# EAGLE board ElectronicsBoard v15 (EAGLE 9.7.0)
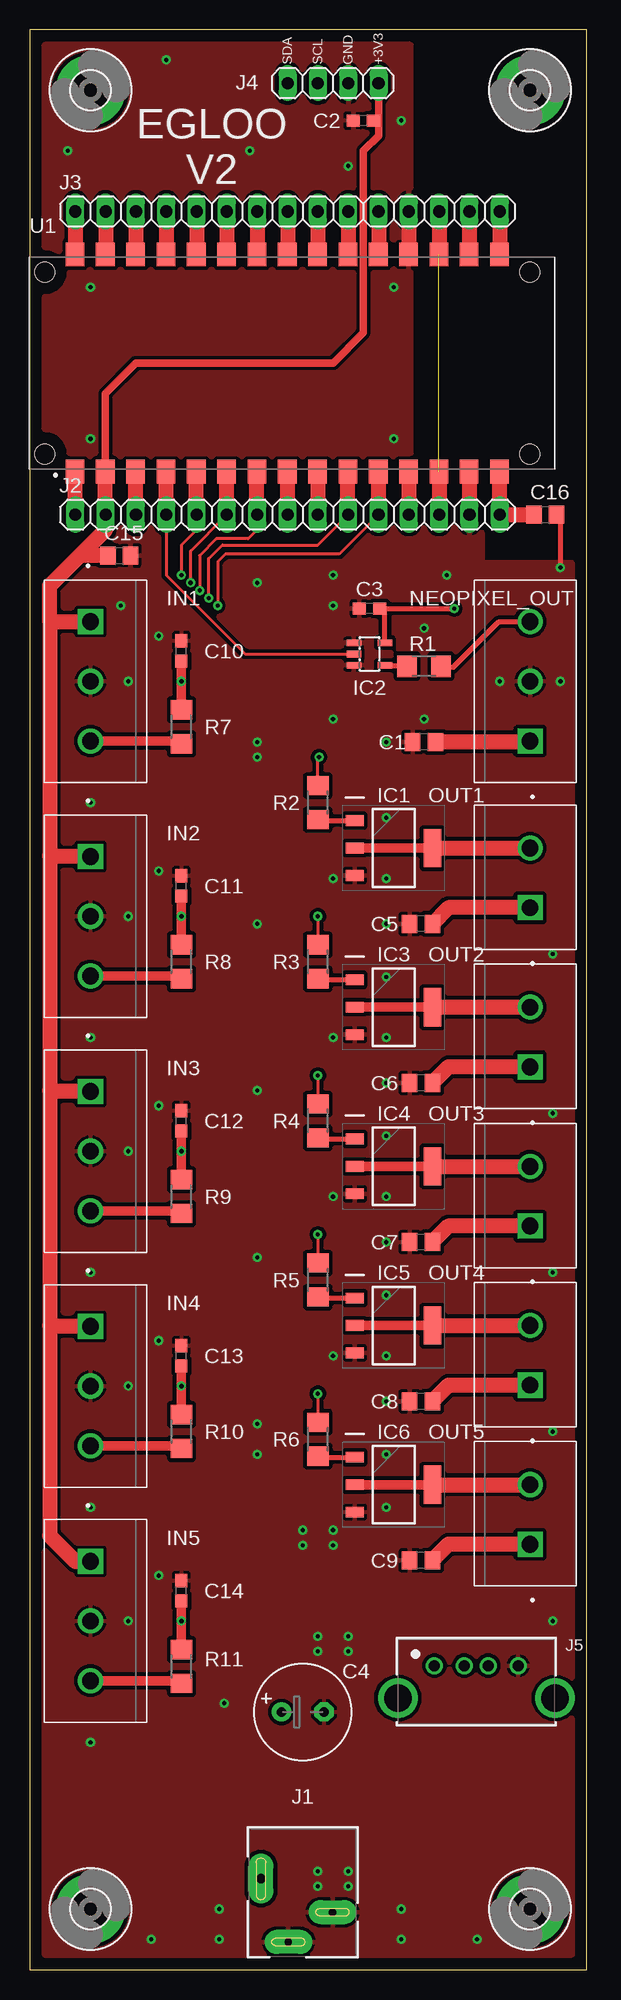
[diagram p0: board, top side]
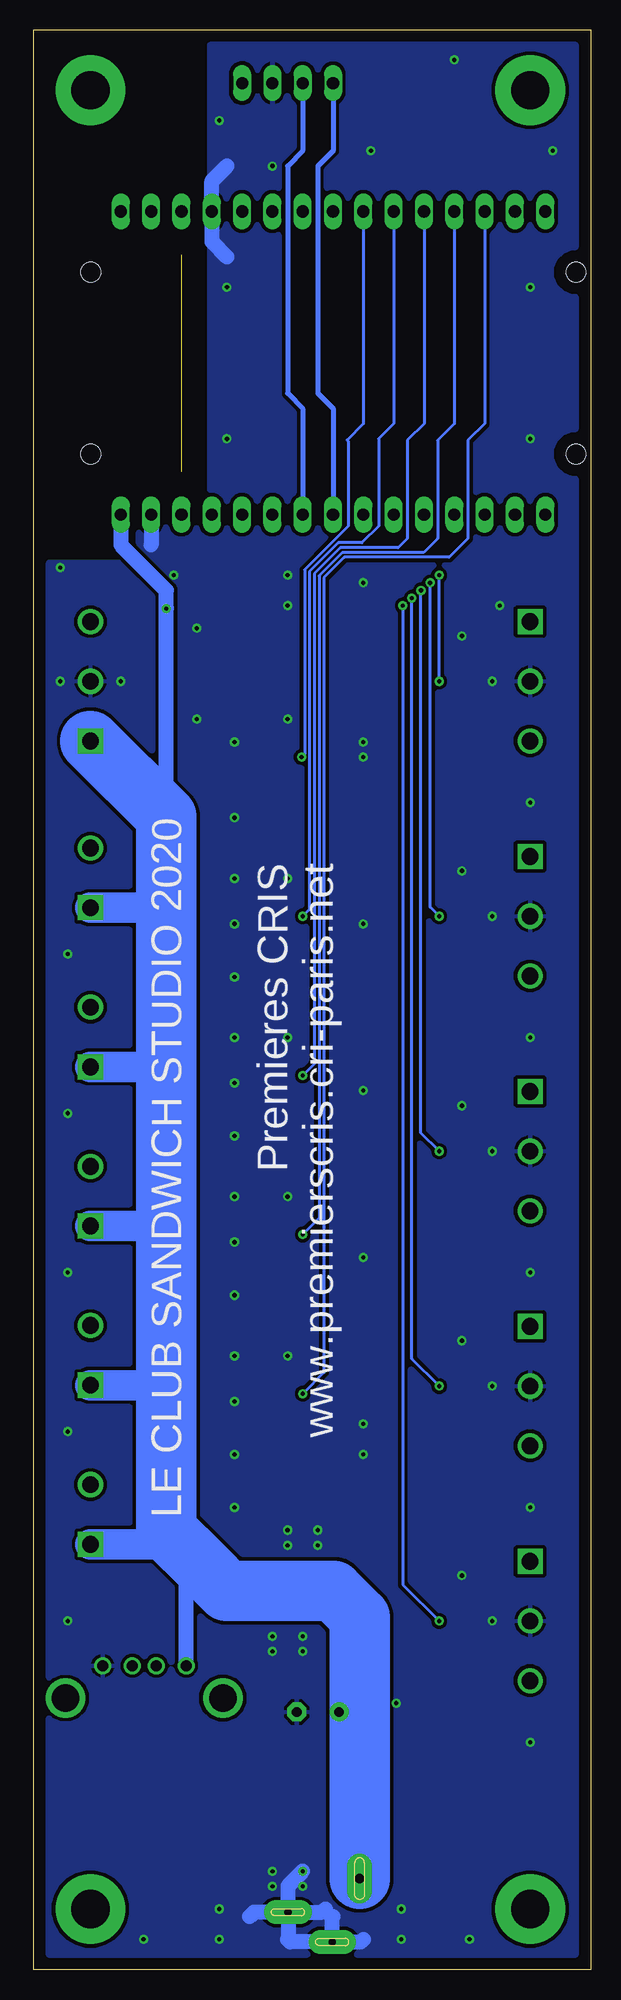
[diagram p1: board, bottom side, seen from below]

Size 46.66 x 162.54 mm. Coordinates in mm from the lower left corner, seen from the top.
Outline: 0,162.54 0,0 46.66,0 46.66,162.54 0,162.54
Copper layers (1*16): Top 0.035mm / dielectric 1.5mm / Bottom 0.035mm
Design rules "default": minimum track width 6mil, minimum drill 0.35mm, track to track 6mil, track to pad 6mil, pad to pad 6mil, via to via 6mil, smd to smd 6mil, copper to edge 40mil, drill to drill 6mil, minimum pad ring 10mil, minimum via ring 8mil, stop-mask expansion 4mil, vias tented up to drill 0mil, thermal gap 10mil

## Footprints (pad centres in the part's own frame; a part is rotated, then mirrored left to right if it is on the bottom)
C0805 = smd 1.3 x 1.5: 1 -0.95,0; 2 0.95,0
C0603 = smd 1.1 x 1: 1 -0.85,0; 2 0.85,0
E3,5-8 = drill 0.813 pad 1.6: + -1.778,0 | drill 0.813 pad 1.6 octagon: - 1.778,0
3,2-PAD = drill 3.2 pad 5.842: B3,2 0,0
SOT230P700X170-4N = smd 1.5 x 0.9: 1 -3.25,2.3; 2 -3.25,0; 3 -3.25,-2.3 | smd 1.5 x 3.2: 4 3.25,0
SOT23-5L = smd 0.55 x 1.2: 1 -0.95,-1.3; 2 0,-1.3; 3 0.95,-1.3; 4 0.95,1.3; 5 -0.95,1.3
PHOENIX_1755529 = drill 1.4 square: 1 -5,0 | drill 1.4: 2 0,0; 3 5,0
694106402002 = drill 0.8 pad 2.1 long: 1 -3.5,0 | drill 0.6 pad 2 long: 2 -1.2,-5.3; 3 2.5,-2.8
1X15 = drill 1.016 long: 1 -17.78,0; 2 -15.24,0; 3 -12.7,0; 4 -10.16,0; 5 -7.62,0; 6 -5.08,0; 7 -2.54,0; 8 0,0; 9 2.54,0; 10 5.08,0; 11 7.62,0; 12 10.16,0; 13 12.7,0; 14 15.24,0; 15 17.78,0
1X04 = drill 1.016 long: 1 -3.81,0; 2 -1.27,0; 3 1.27,0; 4 3.81,0
614004135023 = drill 0.92: 1 -3.5,1.34; 2 -1,1.34; 3 1,1.34; 4 3.5,1.34 | drill 2.3: S1 -6.57,-1.37; S2 6.59,-1.37
PHOENIX_1755516 = drill 1.4 square: 1 -5,0 | drill 1.4: 2 0,0
R1206 = smd 1.6 x 1.803: 1 -1.422,0; 2 1.422,0
MODULE_ABX00030 = smd 1.56 x 2: 1 -18.19,-9.1; 2 -15.65,-9.1; 3 -13.11,-9.1; 4 -10.57,-9.1; 5 -8.03,-9.1; 6 -5.49,-9.1; 7 -2.95,-9.1; 8 -0.41,-9.1; 9 2.13,-9.1; 10 4.67,-9.1; 11 7.21,-9.1; 12 9.75,-9.1; 13 12.29,-9.1; 14 14.83,-9.1; 15 17.37,-9.1; 16 17.37,9.1; 17 14.83,9.1; 18 12.29,9.1; 19 9.75,9.1; 20 7.21,9.1; 21 4.67,9.1; 22 2.13,9.1; 23 -0.41,9.1; 24 -2.95,9.1; 25 -5.49,9.1; 26 -8.03,9.1; 27 -10.57,9.1; 28 -13.11,9.1; 29 -15.65,9.1; 30 -18.19,9.1 | hole 1.651: -20.73,-7.62; -20.73,7.62; 19.91,7.62; 19.91,-7.62

## Placement (x,y rotation side)
C1  10uF  [C0805]  33.02,102.87 180 top
C2  0.1uF  [C0603]  27.94,154.94 180 top
C3  0.1uF  [C0603]  28.45,114.05 180 top
C4  [E3,5-8]  22.86,21.59 0 top
C5  10uF  [C0805]  32.77,87.63 180 top
C6  10uF  [C0805]  32.77,74.3 180 top
C7  10uF  [C0805]  32.77,60.96 180 top
C8  10uF  [C0805]  32.77,47.62 180 top
C9  10uF  [C0805]  32.77,34.29 180 top
C10  0.1uF  [C0603]  12.7,110.49 90 top
C11  0.1uF  [C0603]  12.7,90.81 90 top
C12  0.1uF  [C0603]  12.7,71.12 90 top
C13  0.1uF  [C0603]  12.7,51.44 90 top
C14  0.1uF  [C0603]  12.7,31.75 90 top
C15  10uF  [C0805]  7.49,118.49 0 top
C16  10uF  [C0805]  43.18,121.92 0 top
H1  MOUNT-PAD-ROUND3.2  [3,2-PAD]  5.08,5.08 0 top
H2  MOUNT-PAD-ROUND3.2  [3,2-PAD]  41.91,5.08 0 top
H3  MOUNT-PAD-ROUND3.2  [3,2-PAD]  5.08,157.48 0 top
H4  MOUNT-PAD-ROUND3.2  [3,2-PAD]  41.91,157.48 0 top
IC1  BTS3110N  [SOT230P700X170-4N]  30.48,93.98 0 top
IC2  74AHC1G125  [SOT23-5L]  28.45,110.24 270 top
IC3  BTS3110N  [SOT230P700X170-4N]  30.48,80.64 0 top
IC4  BTS3110N  [SOT230P700X170-4N]  30.48,67.31 0 top
IC5  BTS3110N  [SOT230P700X170-4N]  30.48,53.98 0 top
IC6  BTS3110N  [SOT230P700X170-4N]  30.48,40.64 0 top
IN1  1755529  [PHOENIX_1755529]  5.08,107.95 270 top
IN2  1755529  [PHOENIX_1755529]  5.08,88.27 270 top
IN3  1755529  [PHOENIX_1755529]  5.08,68.58 270 top
IN4  1755529  [PHOENIX_1755529]  5.08,48.9 270 top
IN5  1755529  [PHOENIX_1755529]  5.08,29.21 270 top
J1  [694106402002]  22.86,7.62 0 top
J2  [1X15]  21.59,121.92 0 top
J3  [1X15]  21.59,147.32 0 top
J4  [1X04]  25.4,158.08 180 top
J5  614004135023  [614004135023]  37.4,24.13 0 top
NEOPIXEL_OUT  1755529  [PHOENIX_1755529]  41.91,107.95 90 top
OUT1  1755516  [PHOENIX_1755516]  41.91,93.98 90 top
OUT2  1755516  [PHOENIX_1755516]  41.91,80.64 90 top
OUT3  1755516  [PHOENIX_1755516]  41.91,67.31 90 top
OUT4  1755516  [PHOENIX_1755516]  41.91,53.98 90 top
OUT5  1755516  [PHOENIX_1755516]  41.91,40.64 90 top
R1  470  [R1206]  33.02,109.22 0 top
R2  470  [R1206]  24.13,97.79 270 top
R3  470  [R1206]  24.13,84.45 270 top
R4  470  [R1206]  24.13,71.12 270 top
R5  470  [R1206]  24.13,57.78 270 top
R6  470  [R1206]  24.13,44.45 270 top
R7  470  [R1206]  12.7,104.14 270 top
R8  470  [R1206]  12.7,84.45 270 top
R9  470  [R1206]  12.7,64.77 270 top
R10  470  [R1206]  12.7,45.09 270 top
R11  470  [R1206]  12.7,25.4 270 top
U1  ABX00030  [MODULE_ABX00030]  21.97,134.62 0 top

## Library data of the parts
C1-C16 = rcl; SPICEPREFIX: C
H1-H4 = holes
IC1 IC3-IC6 = SamacSys_Parts; ARROW_PART_NUMBER: BTS3110N; DESCRIPTION: Infineon BTS3110N, Multiplexer Switch IC Power, 4-Pin SOT-223; HEIGHT: 1.7mm; MANUFACTURER_NAME: Infineon; MANUFACTURER_PART_NUMBER: BTS3110N; MOUSER_PART_NUMBER: 726-BTS3110N; MOUSER_PRICE-STOCK: https://www.mouser.co.uk/ProductDetail/Infineon-Technologies/BTS3110N?qs=mzcOS1kGbgdbbkeYFm%2FVOQ%3D%3D
IC2 = adafruit
IN1-IN5 NEOPIXEL_OUT = Phoenix_MSTBVA; MANUFACTURER: Phoenix Contact; MAXIMUM_PACKAGE_HEIGHT: 12.15mm; PARTREV: 04; STANDARD: Manufacturer Recommendations
J1 = Wurth_Connectors_WR-DC; DATASHEET-URL: https://katalog.we-online.com/em/datasheet/694106402002.pdf; IR: 3A; MOUNT: THT; PART-NUMBER: 694106402002; TYPE: Vertical; WORKING-VOLTAGE: 20V(AC)
J2-J4 = pinhead
J5 = Wurth_Connectors_WR-USB; APPLICATION: USB 2.0; DATASHEET-URL: https://www.we-online.com/catalog/datasheet/614004135023.pdf; GERDER: Receptacle; INTERFACE-TYPE: Type A; IR1: 1.5A; MOUNT: THT; PACKAGING: Tray; PART-NUMBER: 614004135023; PINS: 4; TYPE: Vertical; WORKING-VOLTAGE: 30V(AC)
OUT1-OUT5 = Phoenix_MSTBVA
R1-R11 = rcl; SPICEPREFIX: R
U1 = ABX00027

## Nets
!RESET: J2.13 J3.13 U1.13 U1.18
+3V3: C2.1 C15.1 IN1.1 IN2.1 IN3.1 IN4.1 IN5.1 J2.2 J4.1 U1.2
+5V: C1.1 C3.1 C4.+ C5.1 C6.1 C7.1 C8.1 C9.1 C16.1 IC2.5 J1.1 J2.15 J5.1 NEOPIXEL_OUT.1 OUT1.1 OUT2.1 OUT3.1 OUT4.1 OUT5.1 U1.15
AREF: J2.3 U1.3
D2: J3.11 U1.20
D3: J3.10 U1.21
D4: J3.9 U1.22
D5: J3.8 U1.23
D11/MOSI: J3.2 U1.29
D12/MISO: J3.1 U1.30
D13: J2.1 U1.1
GND: C1.2 C2.2 C3.2 C4.- C5.2 C6.2 C7.2 C8.2 C9.2 C10.2 C11.2 C12.2 C13.2 C14.2 C15.2 C16.2 IC1.3 IC2.1 IC2.3 IC3.3 IC4.3 IC5.3 IC6.3 IN1.2 IN2.2 IN3.2 IN4.2 IN5.2 J1.2 J1.3 J2.14 J3.12 J4.2 J5.4 NEOPIXEL_OUT.2 U1.14 U1.19
IN1: C10.1 J2.5 R7.1 U1.5
IN2: C11.1 J2.6 R8.1 U1.6
IN3: C12.1 J2.7 R9.1 U1.7
IN4: C13.1 J2.10 R10.1 U1.10
IN5: C14.1 J2.11 R11.1 U1.11
N$1: IC1.1 R2.2
N$2: NEOPIXEL_OUT.3 R1.2
N$3: IN2.3 R8.2
N$4: IC2.4 R1.1
N$5: IC1.2 IC1.4 OUT1.2
N$6: IC3.1 R3.2
N$7: IC3.2 IC3.4 OUT2.2
N$8: IN3.3 R9.2
N$9: IC4.1 R4.2
N$10: IC4.2 IC4.4 OUT3.2
N$11: IN1.3 R7.2
N$12: IC5.1 R5.2
N$13: IC5.2 IC5.4 OUT4.2
N$14: IN4.3 R10.2
N$15: IC6.1 R6.2
N$16: IC6.2 IC6.4 OUT5.2
N$17: IN5.3 R11.2
NEOPIXEL: IC2.2 J2.4 U1.4
OUT1: J3.7 R2.1 U1.24
OUT2: J3.6 R3.1 U1.25
OUT3: J3.5 R4.1 U1.26
OUT4: J3.4 R5.1 U1.27
OUT5: J3.3 R6.1 U1.28
RX: J3.14 U1.17
SCL: J2.9 J4.3 U1.9
SDA: J2.8 J4.4 U1.8
TX: J3.15 U1.16
VUSB: J2.12 U1.12

## Tracks (layer width: path | path; a pad name or v marks a point on that pad's centre or on a via)
!RESET  (1 unrouted)
  Top 1.27: U1.18 34.29,143.75 J3.13 | U1.13 34.29,125.49 J2.13
+3V3
  Top 0.61: J4.1 29.21,154.94 | U1.2 6.32,132.05 8.89,134.62 25.4,134.62 27.94,137.16 27.94,152.4 29.21,153.67 29.21,154.94 | C2.1 29.21,154.94
  Top 1.27: U1.2 6.32,121.95 J2.2 6.35,120.65 4.19,118.49 | 1.65,113.03 1.65,115.95 4.19,118.49 | 1.65,113.03 1.65,93.34 | 1.65,93.34 1.65,73.66 | 1.65,73.66 1.65,53.98 | 1.65,53.98 1.65,36.37 3.81,34.21 IN5.1 | IN4.1 1.73,53.9 1.65,53.98 | IN3.1 1.73,73.58 1.65,73.66 | IN2.1 1.73,93.27 1.65,93.34 | IN1.1 1.73,112.95 1.65,113.03 | C15.1 4.19,118.49
+5V  (via drill 0.35)
  Top 0.406: 29.72,114.05 C3.1 | 29.72,114.05 v35.56,114.05 | IC2.5 29.75,114.02 29.72,114.05
  Top 1.27: OUT1.1 35.07,88.98 C5.1 | OUT2.1 35.07,75.64 C6.1 | OUT3.1 35.07,62.31 C7.1 | OUT4.1 35.07,48.98 C8.1 | OUT5.1 35.07,35.64 C9.1 | NEOPIXEL_OUT.1 41.83,102.87 C1.1 | U1.15 39.37,125.49 J2.15 C16.1
  Bottom 1.27: 35.56,96.6 v35.56,114.05 35.56,115.57 39.37,119.38 J2.15 | C4.+ 19.36,23.31 19.36,24.13 | J5.1 33.9,32.14 32.38,33.66
  Bottom 2.54: OUT4.1 37.55,48.98 35.56,46.99 | OUT3.1 36.91,62.31 35.56,60.96 | OUT2.1 36.27,75.64 35.56,74.93 | OUT1.1 35.64,88.98 35.56,88.9 | OUT5.1 36.75,35.64 35.56,36.83
  Bottom 5.08: NEOPIXEL_OUT.1 35.56,96.6 35.56,88.9 35.56,74.93 35.56,60.96 35.56,46.99 35.56,36.83 32.38,33.66 30.48,31.75 21.59,31.75 19.36,29.52 19.36,24.13 J1.1
AREF
  Top 1.27: U1.3 8.86,121.95 J2.3
D2
  Top 1.27: U1.20 29.21,143.75 J3.11
D3
  Top 1.27: U1.21 26.67,143.75 J3.10
D4
  Top 1.27: U1.22 24.13,143.75 J3.9
D5
  Top 1.27: U1.23 21.59,143.75 J3.8
D11/MOSI
  Top 1.27: U1.29 6.35,143.75 J3.2
D12/MISO
  Top 1.27: U1.30 3.81,143.75 J3.1
D13
  Top 1.27: U1.1 3.78,121.95 J2.1
GND  (via drill 0.35)
  Top 0.406: C16.2 44.45,121.6 v44.45,117.47
  Top 1.27: J3.12 31.75,143.75 U1.19 | U1.14 36.83,125.52 J2.14
  Bottom 1.27: J1.3 25.36,7.03 v24.13,8.26 | J1.2 25.18,2.32 25.36,2.5 | 25.36,2.5 25.4,2.54 | J1.2 19.27,2.32 19.05,2.54 | J1.3 22.48,4.82 22.23,5.08 | J1.3 28.2,4.82 28.57,4.45 | J1.2 21.66,4.38 21.59,4.45 | J1.3 25.36,2.5 | J2.14 36.83,119.38 | 30.48,151.13 31.75,149.86 J3.12 31.75,144.78 30.48,143.51
  other vias: 5.08,140.97 30.48,140.97 30.48,128.27 5.08,128.27 11.43,160.02 26.67,151.13 31.11,154.94 18.41,152.4 3.17,152.4 34.92,116.84 29.84,102.87 29.84,87.63 29.84,74.3 29.84,60.96 29.84,47.62 31.11,5.08 15.88,2.54 15.88,5.08 31.11,2.54 37.47,2.54 43.81,29.21 43.81,45.09 43.81,58.42 43.81,71.75 43.81,85.09 44.45,107.95 39.37,107.95 25.4,114.3 25.4,104.78 19.05,116.2 8.26,107.95 7.62,114.3 8.26,88.27 8.26,68.58 8.26,48.9 8.26,29.21 10.16,2.54 25.4,35.56 25.4,51.44 25.4,64.77 25.4,78.11 25.4,91.44 19.05,101.6 19.05,102.87 5.08,97.79 5.08,78.11 5.08,58.42 5.08,38.73 5.08,19.05 26.67,8.26 22.86,35.56 19.05,43.18 19.05,87.63 19.05,73.66 19.05,59.69 19.05,45.72 10.79,111.76 10.79,92.08 10.79,72.39 10.79,52.7 10.79,33.02 25.4,36.83 22.86,36.83 24.13,6.99 26.67,6.99 25.4,116.84 29.84,91.44 29.84,78.11 29.84,64.77 29.84,51.44 29.84,38.73 33.02,112.39 33.02,104.78 29.84,69.85 29.84,56.52 29.84,43.18 29.84,83.19 29.84,96.52 16.29,22.34 24.13,27.94 26.67,27.94 24.13,26.67 26.67,26.67
  pour Top (isolate 0.305): 38.1,123.19 32.13,123.19 32.13,173.99 -13.97,173.99 -13.97,-7.62 49.53,-7.62 49.53,118.11 38.1,118.11
  pour Bottom (isolate 0.305): 38.1,123.19 32.13,123.19 32.13,173.99 -13.97,173.99 -13.97,-7.62 49.53,-7.62 49.53,118.11 38.1,118.11
IN1  (via drill 0.35)
  Top 0.254: J2.5 13.97,120.65 12.7,119.38 v12.7,116.84
  Top 0.813: C10.1 v12.7,107.95 R7.1
  Top 1.27: U1.5 13.94,121.95 J2.5
  Bottom 0.254: v12.7,107.95 v12.7,116.84
IN2  (via drill 0.35)
  Top 0.254: J2.6 13.46,118.87 v13.46,116.2
  Top 0.813: C11.1 v12.7,88.27 R8.1
  Top 1.27: U1.6 16.48,121.95 J2.6
  Bottom 0.254: v13.46,116.2 13.46,89.03 v12.7,88.27
IN3  (via drill 0.35)
  Top 0.254: J2.7 19.05,120.65 18.29,119.89 15.62,119.89 14.22,118.49 v14.22,115.57
  Top 0.813: C12.1 v12.7,68.58 R9.1
  Top 1.27: U1.7 19.02,121.95 J2.7
  Bottom 0.254: v14.22,115.57 14.22,70.1 v12.7,68.58
IN4  (via drill 0.35)
  Top 0.254: J2.10 24.13,119.38 16.13,119.38 14.99,118.24 v14.99,114.94
  Top 0.813: C13.1 v12.7,48.9 R10.1
  Top 1.27: U1.10 26.64,121.95 J2.10
  Bottom 0.254: v14.99,114.94 14.99,51.18 v12.7,48.9
IN5  (via drill 0.35)
  Top 0.254: J2.11 25.91,118.62 16.38,118.62 15.75,117.98 v15.75,114.3
  Top 0.813: C14.1 v12.7,29.21 R11.1
  Top 1.27: U1.11 29.18,121.95 J2.11
  Bottom 0.254: v15.75,114.3 15.75,32.26 v12.7,29.21
N$1
  Top 0.406: IC1.1 24.22,96.28 R2.2
N$2
  Top 0.406: R1.2 34.52,109.14 35.48,109.14 39.29,112.95 NEOPIXEL_OUT.3
N$3
  Top 0.813: IN2.3 12.47,83.27 R8.2
N$4
  Top 0.406: IC2.4 31.53,109.29 R1.1
N$5
  Top 0.813: IC1.4 IC1.2
  Top 1.27: IC1.4 OUT1.2
N$6
  Top 0.406: IC3.1 24.22,82.94 R3.2
N$7
  Top 0.813: IC3.2 IC3.4
  Top 1.27: IC3.4 OUT2.2
N$8
  Top 0.813: IN3.3 12.47,63.58 R9.2
N$9
  Top 0.406: IC4.1 24.22,69.61 R4.2
N$10
  Top 0.813: IC4.2 IC4.4
  Top 1.27: IC4.4 OUT3.2
N$11
  Top 0.813: IN1.3 12.47,102.95 R7.2
N$12
  Top 0.406: IC5.1 24.22,56.27 R5.2
N$13
  Top 0.813: IC5.2 IC5.4
  Top 1.27: IC5.4 OUT4.2
N$14
  Top 0.813: IN4.3 12.47,43.9 R10.2
N$15
  Top 0.406: IC6.1 24.22,42.94 R6.2
N$16
  Top 0.813: IC6.2 IC6.4
  Top 1.27: IC6.4 OUT5.2
N$17
  Top 0.813: IN5.3 12.47,24.21 R11.2
NEOPIXEL
  Top 0.254: J2.4 11.43,116.84 18.03,110.24 IC2.2
  Top 1.27: U1.4 11.4,121.95 J2.4
OUT1  (via drill 0.35)
  Top 0.254: v24.23,101.6 24.13,101.5 R2.1
  Top 1.27: U1.24 19.05,143.75 J3.7
  Bottom 0.254: J3.7 19.05,129.54 20.42,128.17 20.32,128.07 20.32,120.95 23.98,117.3 23.98,101.85 v24.23,101.6
OUT2  (via drill 0.35)
  Top 0.254: v24.13,88.27 R3.1
  Top 1.27: U1.25 16.51,143.75 J3.6
  Bottom 0.254: J3.6 16.51,129.54 17.78,128.27 17.78,120.95 19.18,119.56 21.14,119.56 23.57,117.13 23.57,88.82 v24.13,88.27
OUT3  (via drill 0.35)
  Top 0.254: v24.13,74.93 R4.1
  Top 1.27: U1.26 13.97,143.75 J3.5
  Bottom 0.254: J3.5 13.97,129.54 15.37,128.14 15.37,119.91 16.13,119.15 20.97,119.15 23.16,116.96 23.16,75.89 v24.13,74.93
OUT4  (via drill 0.35)
  Top 0.254: v24.13,61.59 R5.1
  Top 1.27: U1.27 11.43,143.75 J3.4
  Bottom 0.254: J3.4 11.43,129.54 12.83,128.14 12.83,119.91 13.99,118.75 20.81,118.75 22.76,116.79 22.76,62.97 v24.13,61.59
OUT5  (via drill 0.35)
  Top 0.254: v24.13,48.26 R6.1
  Top 1.27: U1.28 8.89,143.75 J3.3
  Bottom 0.254: J3.3 8.89,129.54 10.29,128.14 10.29,119.91 11.86,118.34 20.64,118.34 22.35,116.62 22.35,50.04 v24.13,48.26
RX
  Top 1.27: U1.17 36.83,143.75 J3.14
SCL
  Top 1.27: U1.9 24.1,121.95 J2.9
  Bottom 0.406: J4.3 24.13,152.4 25.4,151.13 25.4,132.08 24.13,130.81 J2.9
SDA
  Top 1.27: U1.8 21.56,121.95 J2.8
  Bottom 0.406: J4.4 21.59,152.4 22.86,151.13 22.86,132.08 21.59,130.81 J2.8
TX
  Top 1.27: U1.16 39.37,143.75 J3.15
VUSB
  Top 1.27: U1.12 31.75,125.49 J2.12

## Text on the board
tNames: SDA | SCL | GND | +3V3 | EGLOO / V2
bNames: LE CLUB SANDWICH STUDIO 2020 | Premieres CRIS / www.premierscris.cri-paris.net